# Altium PCB Gate_Driver_SMPS_V2.0_PCB4.PcbDoc
Units mm, origin at the board's own origin, x right, y up, seen from the top; angles counter-clockwise.
Board outline 50 x 30 mm, 2 copper layers (Top Layer, Bottom Layer); 42 components, 33 nets, 126 pads, 40 vias.
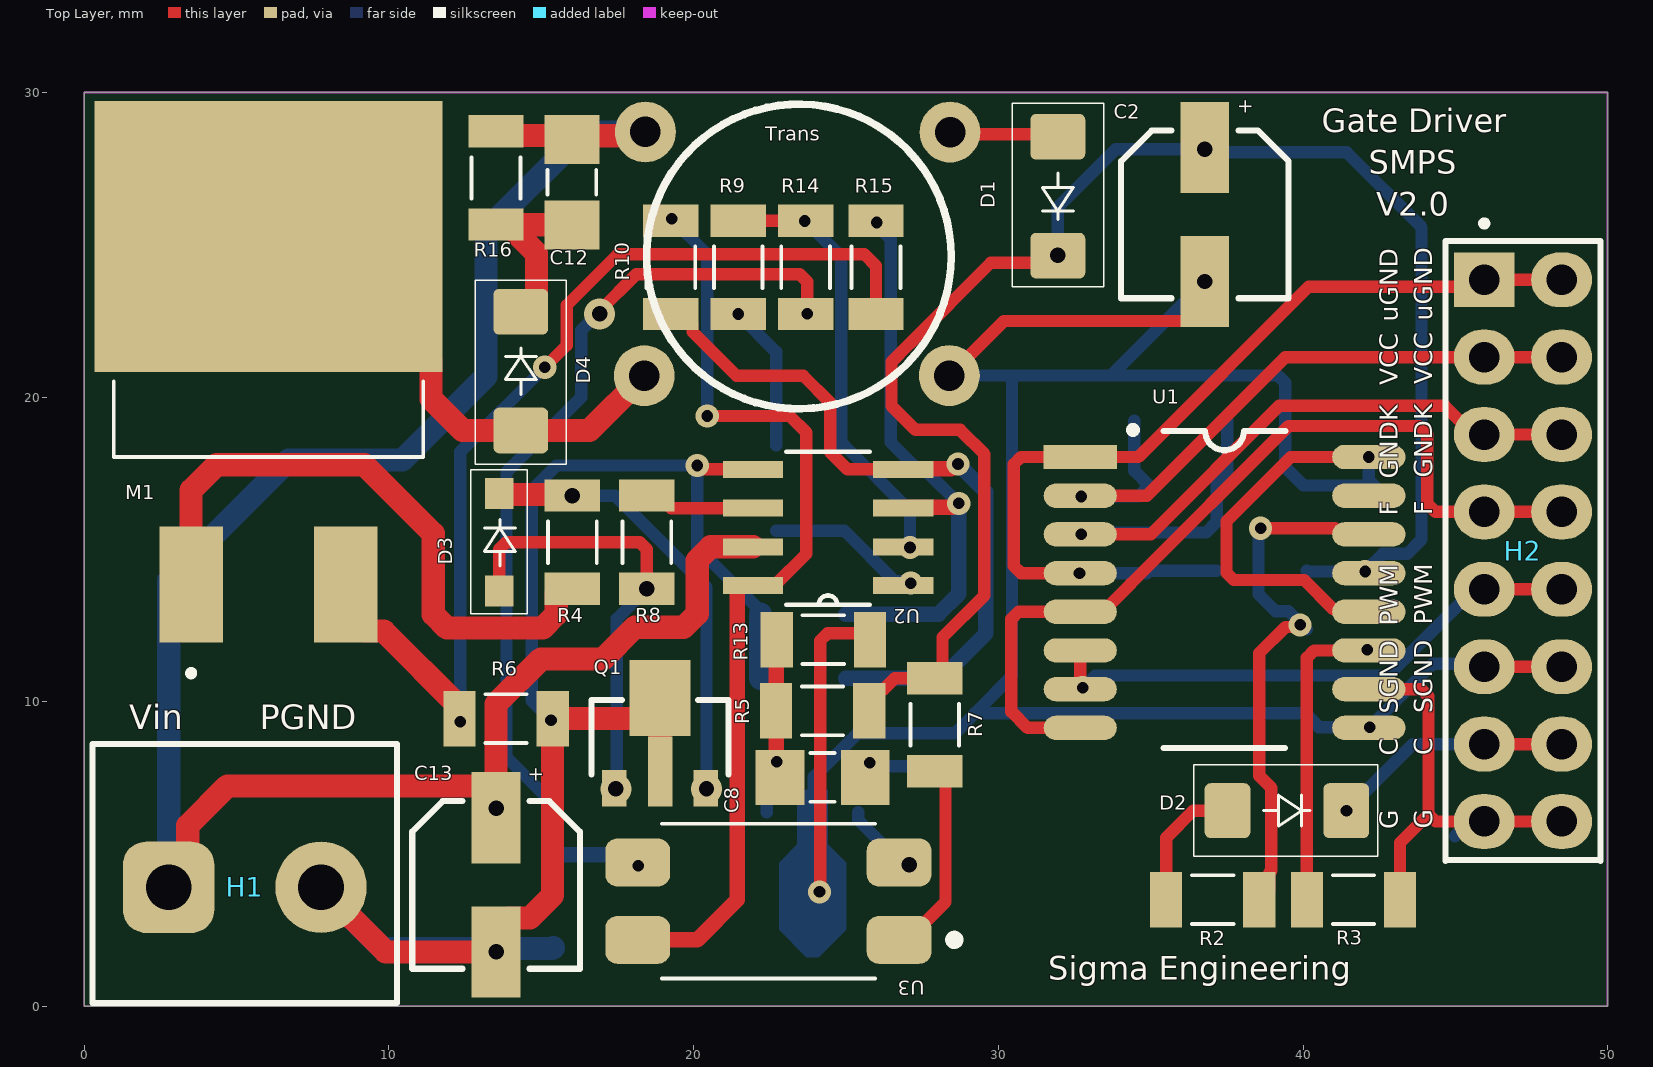
[diagram p0: Top Layer view]
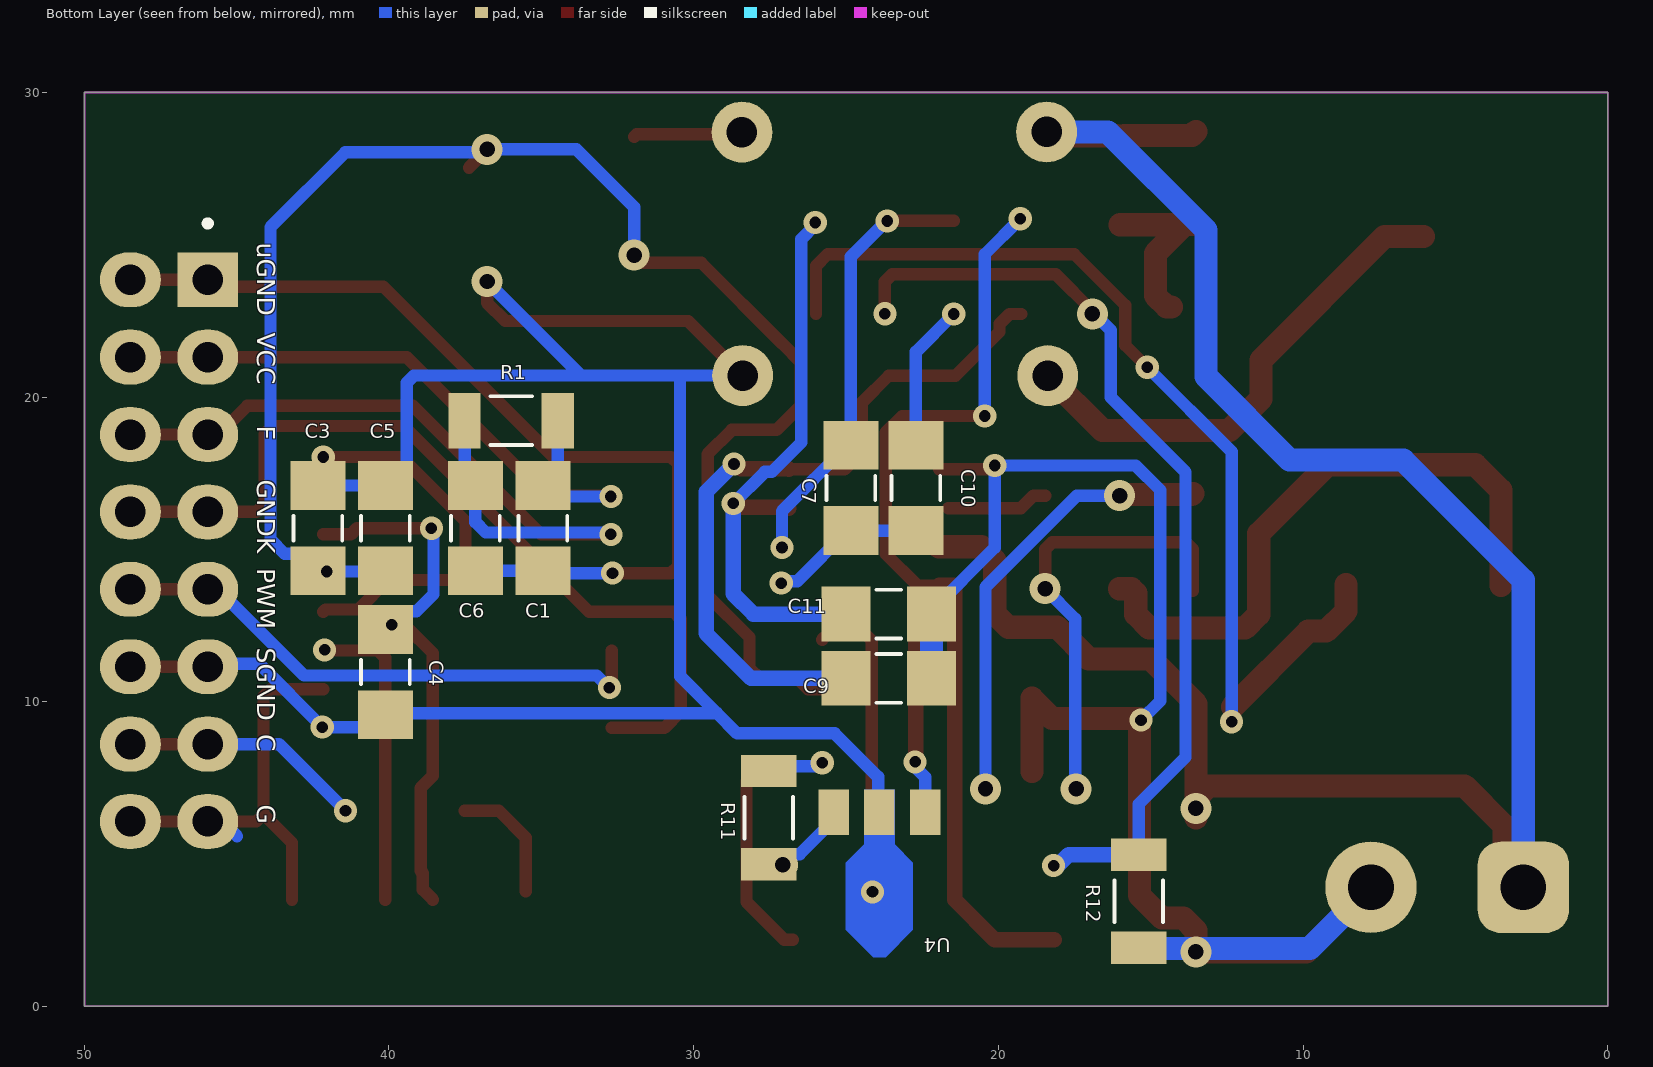
[diagram p1: Bottom Layer view, seen from below]
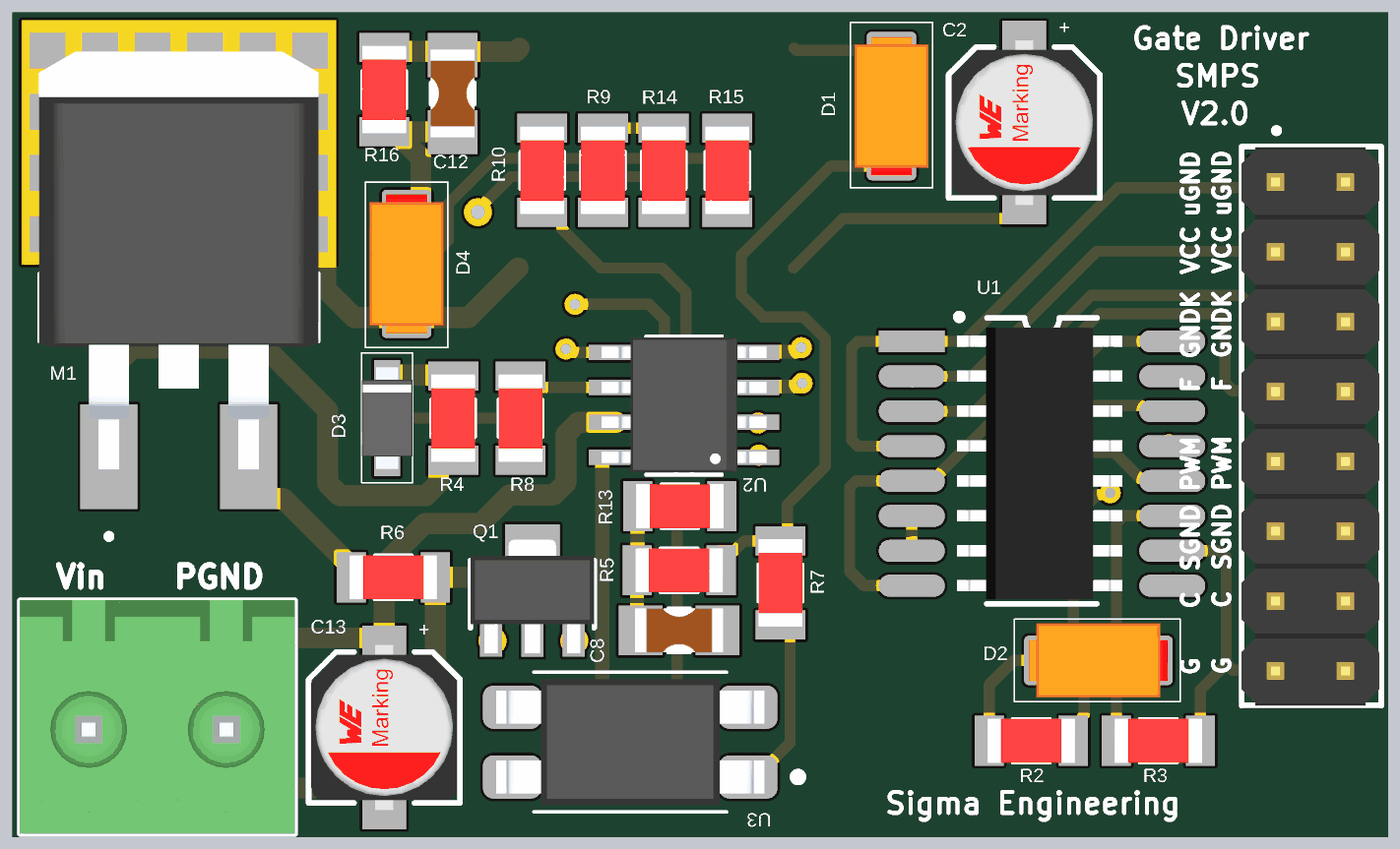
[diagram p2: 3D render of the assembled board from above, using the file's embedded part models]
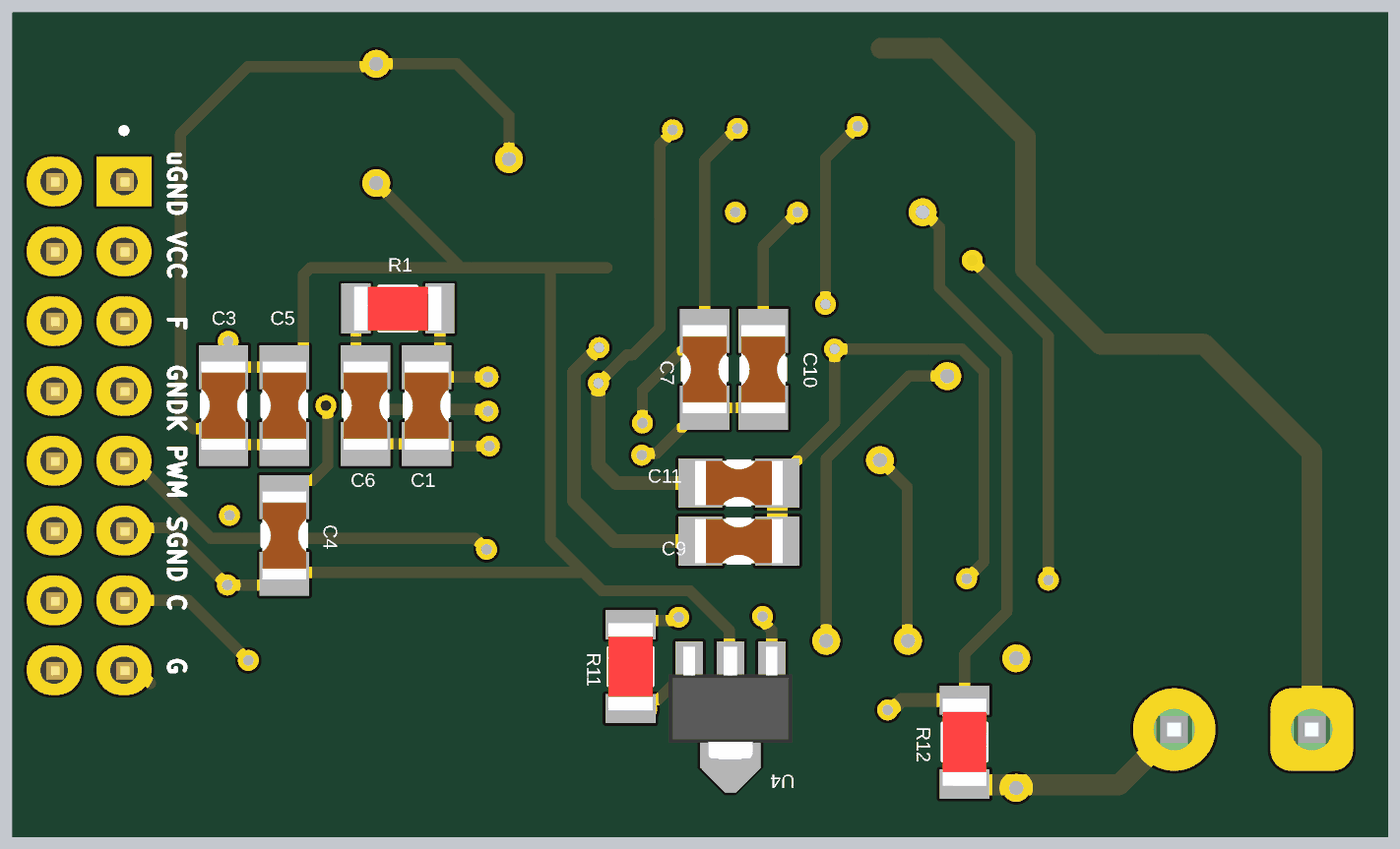
[diagram p3: 3D render of the assembled board from below, using the file's embedded part models]

## Layer stack, top to bottom
Top Solder: solder mask 0.0102, Solder Resist, Dk 3.5
Top Layer: signal copper 0.0356
Dielectric 1: dielectric 0.32, FR-4, Dk 4.8
Bottom Layer: signal copper 0.0356
Bottom Solder: solder mask 0.0102, Solder Resist, Dk 3.5

## Board outline
0,0 50,0 50,30 0,30

## Design rules (kind name [scope] priority, off if disabled: settings)
Clearance [All] p1: gap=0.254 ignorepadtopadclearanceinfootprint=FALSE except(0: Arc-Hole Track-Hole SMDPad-Hole THPad-Hole Via-Hole Fill-Hole Poly-Hole Region-Hole Text-Hole)
MinimumSolderMaskSliver [All] p1: minsoldermaskwidth=0.1
PolygonConnect [All] p1: connectstyle=Relief reliefconductorwidth=0.254 reliefentries=4 polygonreliefangle="90 Angle" airgapwidth=0.254
RoutingVias [All] p1: holewidth=0.508 width=1.016 viastyle="Through Hole" minholewidth=0.381 minwidth=0.762 maxholewidth=0.762 maxwidth=1.524
SilkToSilkClearance [All] p1: silktosilkclearance=0
SilkToSolderMaskClearance [IsPad] p1: minsilkscreentomaskgap=0 clearancetoexposedcopper=TRUE
SolderMaskExpansion [All] p1: expansion=0.102 istentingtop=FALSE
Width [All] p1: maxlimit=0.762 minlimit=0.406 preferedwidth=0.508
27 further rules are at their usual default settings.

## Components (designator, comment, footprint, x,y, rotation, side; value= is the part's Value field where it differs from the comment)
C1 "0.1u" CAP_1206 34.95,15.697 r270 bottom
C2 "470u-50v" WCAP-ASLI_D5H5.5 36.779,25.994 r90 top
C3 "100p" CAP_1206 42.333,15.697 r90 bottom
C4 "0.1u" CAP_1206 40.118,10.973 r270 bottom
C5 "0.1u" CAP_1206 40.118,15.697 r90 bottom
C6 "1n" CAP_1206 37.166,15.697 r270 bottom
C7 "10nAC" CAP_1206 24.841,17.018 r270 bottom
C8 "10n" CAP_1206 24.232,7.518 r180 top
C9 "13.6n" CAP_1206 23.597,10.77 r0 bottom
C10 "10nAC" CAP_1206 22.708,17.018 r270 bottom
C11 "100pf" CAP_1206 23.597,12.878 r0 bottom
C12 "3.3n" CAP_1206 16.002,27.051 r90 top
C13 "470u-50v" WCAP-ASLI_D5H5.5 13.513,3.988 r90 top
D1 "Diode" US1K_SMD 31.953,26.594 r90 top
D2 "Diode" US1K_SMD 39.472,6.426 r180 top
D3 "1N5817" 1N5817W 13.614,15.24 r270 top
D4 "Diode" US1K_SMD 14.326,20.853 r270 top
H1 "PS-IN" PLUG 5.269,4.362 r0 top
H2 "H2*8" HDR2X8 45.949,23.851 r270 top
M1 "IRF540N" IRF540N_SMD 6.045,20.828 r90 top
Q1 "B772-PNP" B772_SMD 18.898,8.763 r0 top
R1 "4.7K" RES_1206 35.992,19.228 r180 bottom
R2 "100" RES_1206 37.033,3.505 r0 top
R3 "8.2" RES_1206 41.656,3.505 r0 top
R4 "20" RES_1206 16.02,15.24 r90 top
R5 "13.5K" RES_1206 24.232,9.703 r0 top
R6 "0.25/4W" RES_1206 13.843,9.449 r180 top
R7 "1K" RES_1206 27.915,9.246 r90 top
R8 "47" RES_1206 18.466,15.24 r90 top
R9 "11.2K" RES_1206 21.463,24.257 r270 top
R10 "600-POTENTIO" RES_1206 19.253,24.257 r90 top
R11 "16K" RES_1206 27.534,6.198 r90 bottom
R12 "1K" RES_1206 15.392,3.454 r90 bottom
R13 "2.5K" RES_1206 24.257,12.04 r180 top
R14 "5.6K" RES_1206 23.673,24.257 r270 top
R15 "42K" RES_1206 25.984,24.257 r270 top
R16 "510" RES_1206 13.513,27.193 r90 top
Trans "core-name" TRANSFORMER_2 15.165,-65.548 r0 top locked (schematic designator trans1)
U1 "FOD8332" "SO16 - W" 32.69,18.034 r0 top
U2 "UC3843BN" UC3843_SMD 24.409,15.723 r180 top
U3 "PC817" PC816_SMD 22.454,3.454 r180 top
U4 "TL431" VREG_TL431IPK 23.901,4.369 r0 bottom

## Footprints (in the part's own frame and the unit in brackets; to place one, negate y for a bottom-side part, rotate by r counter-clockwise, add the part's x,y. Pads: shape width x height; smd on the part's side, far side on the other; paste and mask are expansions set on the pad)
1N5817W [mm]
  rect 1.02x0.94 smd: A(1.6,0) C(-1.6,0)
  silkscreen extent -2.37,-0.92 2.35,0.92, body extent -1.85,-0.92 1.85,0.92, height 1.35
B772_SMD [mm]
  rect 0.8x1.2 smd: B(-1.5,-1.6) E(1.5,-1.6)
  rect 0.8x2.3 smd paste-2 mask+0: C(0,-1.05)
  rect 2x2.5 smd: C(0,1.36)
  silkscreen extent -2.25,-1.15 2.25,1.3, body extent -2.25,-2.07 2.25,2.05, height 1.6
CAP_1206 [mm]
  rect 1.6x1.8 smd: 1(-1.4,0) 2(1.4,0)
  silkscreen extent -0.4,-0.8 0.4,0.8, body extent -1.6,-0.8 1.6,0.8, height 1.5
HDR2X8 [mm] "Connector; Header; 4x2 Position"
  oval 1.8x2 hole 1: 1(0,2.54) 2(2.54,2.54) 2(2.54,0) 3(5.08,2.54) 3(5.08,0) 4(7.62,0) 4(7.62,2.54) 5(10.16,0) 5(10.16,2.54) 6(12.7,0) 6(12.7,2.54) 7(15.24,0) 7(15.24,2.54) 8(17.78,0) 8(17.78,2.54)
  rect 1.8x2 hole 1: 1(0,0)
  silkscreen extent -1.95,-1.27 19.08,3.81, body extent -1.24,-1.27 19.08,3.73, height 8.6
IRF540N_SMD [mm]
  rect 8.89x11.43 smd paste-7: D(4.445,0)
  rect 3.81x2.08 smd: G(-6.985,2.54) S(-6.985,-2.54)
  silkscreen extent -9.99,-5.08 -0.32,5.08, body extent -7.49,-5.08 7.75,5.08, height 4.83
PC816_SMD [mm]
  rrect50% 2.13x1.57 smd: 1(-4.29,1.27) 2(-4.29,-1.27) 3(4.29,-1.27) 4(4.29,1.27)
  silkscreen extent -6.25,-2.54 3.5,2.54, body extent -4.87,-2.29 4.87,2.29, height 4
PLUG [mm] "5.00mm - Open Vertical PCB Header - 02p"
  rrect50% 3x3 hole 1.5: 1(-2.5,-0.45)
  round 3 hole 1.5: 2(2.5,-0.45)
  silkscreen extent -5,-4.25 5,4.25, body extent -5,-4.25 5,4.25, height 12.1
RES_1206 [mm]
  rect 1.06x1.82 smd: 1(-1.528,0) 2(1.528,0)
  silkscreen extent -0.68,-0.8 0.68,0.8, body extent -1.6,-0.8 1.6,0.8, height 0.7
"SO16 - W" [mm]
  rect 2.4x0.8 smd: 1(0,0)
  oval 2.4x0.8 smd: 2(0,-1.27) 3(0,-2.54) 4(0,-3.81) 5(0,-5.08) 6(0,-6.35) 7(0,-7.62) 8(0,-8.89) 9(9.47,-8.89) 10(9.47,-7.62) 11(9.47,-6.35) 12(9.47,-5.08) 13(9.47,-3.81) 14(9.47,-2.54) 15(9.47,-1.27) 16(9.47,0)
  silkscreen extent 1.63,-9.55 6.73,0.99, body extent 1.65,-9.39 7.65,0.51, height 1.4
TRANSFORMER_2 [mm]
  round 2 hole 1: 1(3.212,86.25) 2(3.25,94.25) 3(13.226,86.255) 4(13.249,94.247)
  silkscreen extent 3.29,85.16 13.29,95.16, body extent 3.23,85.26 13.23,95.26, height 7
UC3843_SMD [mil]
  rect 78x22 smd: 1(-97,75) 2(-97,25) 3(-97,-25) 4(-97,-75) 5(97,-75) 6(97,-25) 7(97,25) 8(97,75)
  silkscreen extent -54,-98 54,100, body extent -118,-96 118,96, height 69
US1K_SMD [mm]
  rrect25% 1.5x1.8 smd: A(1.95,0) K(-1.95,0)
  silkscreen extent -2.97,-1.5 3.05,1.5, body extent -2.53,-1.35 2.52,1.35, height 2.17
VREG_TL431IPK [mm]
  rect 1x1.5 smd paste-2 mask+0: A(0,-2)
  rect 1x1.5 smd: C(1.5,-2) R(-1.5,-2)
  Top Layer region: 1.1,1.85 1.1,-0.35 0.5,-0.95 0.5,-2.75 -0.5,-2.75 -0.5,-0.95 -1.1,-0.35 -1.1,1.85 -0.2,2.75 0.2,2.75
  body extent -2.25,-2.56 2.25,1.54, height 1.6
WCAP-ASLI_D5H5.5 [mm] "Aluminium Electrolytic V-Chip SMT Capacitors, 5x5.5mm"
  rect 3x1.6 smd: 1(2.2,0) 2(-2.2,0)
  silkscreen extent -2.75,-2.75 2.75,2.75, body extent -3,-2.65 3,2.65, height 5.5

## Part data
C1 C2 C3 C4 C5 C6 C13: library part CAP-DC
C7 C8 C9 C10 C11 C12: library part CAP-AC
D3: "Lite-On 1N5817, Schottky Diode, 20V 3A, 2-Pin DO-201AD", Average Rectified Current=3A, Case/Package=DO-201AD, Forward Voltage=850mV, Manufacturer=Vishay, Manufacturer Part Number=1N5820, Max Forward Surge Current (Ifsm)=80A, Max Operating Temperature=125°C, Max Repetitive Reverse Voltage (Vrrm)=20V, Max Reverse Current=150uA, Max Reverse Leakage Current=2mA, Min Operating Temperature=-65°C, Supplier Part Number 1=700-9899, ComponentLink1Description=http://www.liteon-semi.com/download.php?hSFile=1N5820-1N5822-5.pdf&hDFile=tecfile01312524214.pdf&src-supplier=Avnet+Asia, ComponentLink1URL=http://www.liteon-semi.com/download.php?hSFile=1N5820-1N5822-5.pdf&hDFile=tecfile01312524214.pdf&src-supplier=Avnet+Asia, ComponentLink2Description=http://docs-usa.electrocomponents.com/techlib:/itc_doclist_US.htm?stockno=7009899&src-supplier=Allied+Electronics, ComponentLink2URL=http://docs-usa.electrocomponents.com/techlib:/itc_doclist_US.htm?stockno=7009899&src-supplier=Allied+Electronics, Element Configuration=Single, Forward Current=3A, Height=5.3mm, Length=9.5mm, Max Surge Current=80A, Mount="Through Hole", Number of Pins=2, Packaging=Bulk, Peak Non-Repetitive Surge Current=80A, Radiation Hardening=No, RoHS Compliant=No, Stock 1=0, Supplier 1=RSComponents, Width=5.3mm
H1: library part PS-plug
H2: library part "Header 8X2"
M1: "Mosfet, Power; N-ch; Vdss 100V; Rds(on) 44MILLIOHMS; Id 33A; TO-220AB; Pd 130W; -55DEG", Case/Package=TO-220AB, Continuous Drain Current (ID)=33A, Gate to Source Voltage (Vgs)=20V, Manufacturer="International Rectifier", Max Operating Temperature=175°C, Min Operating Temperature=-55°C, Power Dissipation=130W, Supplier Part Number 1=IRF540NPBF-TUBE, ComponentLink1Description=http://www.produktinfo.conrad.com/datenblaetter/150000-174999/162412-da-01-en-IRF_540_N.pdf?src-supplier=Conrad, ComponentLink1URL=http://www.produktinfo.conrad.com/datenblaetter/150000-174999/162412-da-01-en-IRF_540_N.pdf?src-supplier=Conrad, Manufacturer Part Number=IRF540N, Mount="Through Hole", Number of Elements=1, Number of Pins=3, RoHS Compliant=No, Stock 1=0, Supplier 1="Future Electronics"
R1 R2 R3 R4 R5 R6 R7 R8 R9 R10 R11 R12 R13 R14 R15 R16: library part RES
Trans: library part "flyback trans"
U1: library part TLP5214A
U2: "IC REG CTRLR BST/FLYBK 8-MINIDIP", Case/Package=PDIP, Frequency=250kHz, Manufacturer=STMicroelectronics, Max Frequency=500kHz, Max Operating Temperature=150°C, Max Power Dissipation=800mW, Max Supply Current=17mA, Max Supply Voltage=30V, Min Operating Temperature=-40°C, Min Supply Voltage=12V, Output Current=1A, Output Voltage=5.1V, Package Quantity=50, ComponentLink1Description=http://www.st.com/content/ccc/resource/technical/document/datasheet/b6/e8/cc/ba/4f/cd/42/9b/CD00000966.pdf/files/CD00000966.pdf/jcr:content/translations/en.CD00000966.pdf?src-supplier=Digi-Key, ComponentLink1URL=http://www.st.com/content/ccc/resource/technical/document/datasheet/b6/e8/cc/ba/4f/cd/42/9b/CD00000966.pdf/files/CD00000966.pdf/jcr:content/translations/en.CD00000966.pdf?src-supplier=Digi-Key, ComponentLink2Description=http://www.mouser.com/ds/2/389/uc2842b-974450.pdf?src-supplier=Mouser, ComponentLink2URL=http://www.mouser.com/ds/2/389/uc2842b-974450.pdf?src-supplier=Mouser, ComponentLink3Description=http://www.st.com/web/en/resource/technical/document/datasheet/CD00000966.pdf?src-supplier=Avnet, ComponentLink3URL=http://www.st.com/web/en/resource/technical/document/datasheet/CD00000966.pdf?src-supplier=Avnet, ComponentLink4Description=http://www.st.com/web/en/resource/technical/document/datasheet/CD00000966.pdf?src-supplier=Future+Electronics, ComponentLink4URL=http://www.st.com/web/en/resource/technical/document/datasheet/CD00000966.pdf?src-supplier=Future+Electronics, ComponentLink5Description=https://www.verical.com/server-webapp/html/getDatasheet?partID=66041&src-supplier=Verical, ComponentLink5URL=https://www.verical.com/server-webapp/html/getDatasheet?partID=66041&src-supplier=Verical, ComponentLink6Description=http://www.produktinfo.conrad.com/datenblaetter/1100000-1199999/001185662-da-01-en-IC_REG_CTRLR_PWM_CM_UC3843BN_DIP_8_STM.pdf?src-supplier=Conrad, ComponentLink6URL=http://www.produktinfo.conrad.com/datenblaetter/1100000-1199999/001185662-da-01-en-IC_REG_CTRLR_PWM_CM_UC3843BN_DIP_8_STM.pdf?src-supplier=Conrad, Duty Cycle=100%, Fall Time=50ns, Height=3.32mm, Lead Free="Lead Free", Length=10.92mm, Manufacturer Part Number=UC3843BN, Max Duty Cycle=100%, Mount="Through Hole", Number of Outputs=1, Number of Pins=8, Packaging=Rail/Tube, Power Dissipation=800mW, Pricing 1="1=0.9063, 10=0.7523, 25=0.7389, 100=0.6172, 250=0.5737, 500=0.4903, 1000=0.3493, 4000=0.3129, 5000=0.3123, 6000=0.3104, 8000=0.3085, 10000=0.3066, 20000=0.3047, 25000=0.3027, 30000=0.3008, 50000=0.2988 (USD)", Radiation Hardening=No, REACH SVHC="No SVHC", Rise Time=50ns, RoHS Compliant=Yes, Series=-, Stock 1=669, Supplier 1="Arrow Electronics", Supplier Part Number 1=UC3843BN, Switching Frequency=500kHz, Topology=Boost,Flyback, Weight=0.032805oz, Width=6.6mm
U3: "Optocoupler DC-IN 1-CH Transistor DC-OUT 4-Pin PDIP Sleeve", Case/Package=PDIP, Collector Emitter Saturation Voltage=200mV, Collector Emitter Voltage (VCEO)=35V, Current Transfer Ratio=600%, Forward Current=50mA, Forward Voltage=1.4V, Manufacturer=Sharp, Max Operating Temperature=100°C, Min Operating Temperature=-30°C, Power Dissipation=200mW, Reverse Breakdown Voltage=6V, Fall Time=18000ns, Input Type=DC, Manufacturer Part Number=PC817, Mount="Through Hole", Number of Elements=1, Number of Pins=4, Packaging=Sleeve, Rise Time=18000ns, RoHS Compliant=No, Stock 1=0, Supplier 1="Arrow Electronics", Supplier Part Number 1=PC817
U4: library part TL431CZ, "V-Ref Adjustable 2.495V to 36V 100mA 3-Pin TO-92 Bulk", Case/Package=TO-92, Cathode Current=1mA, Manufacturer=STMicroelectronics, Max Input Voltage=37V, Max Operating Temperature=70°C, Max Output Current=100mA, Max Output Voltage=36V, Min Operating Temperature=0°C, Min Output Voltage=2.495V, Package Quantity=1, Temperature Coefficient=100ppm/°C, Tolerance=2.21%, Accuracy=2%, ComponentLink1Description=http://www.st.com/web/en/resource/technical/document/datasheet/CD00000986.pdf?src-supplier=Digi-Key, ComponentLink1URL=http://www.st.com/web/en/resource/technical/document/datasheet/CD00000986.pdf?src-supplier=Digi-Key, ComponentLink2Description=http://www.st.com/content/ccc/resource/technical/document/datasheet/2d/27/af/41/03/e2/44/8e/CD00000986.pdf/files/CD00000986.pdf/jcr:content/translations/en.CD00000986.pdf?src-supplier=Digi-Key, ComponentLink2URL=http://www.st.com/content/ccc/resource/technical/document/datasheet/2d/27/af/41/03/e2/44/8e/CD00000986.pdf/files/CD00000986.pdf/jcr:content/translations/en.CD00000986.pdf?src-supplier=Digi-Key, ComponentLink3Description=http://www.farnell.com/datasheets/1690313.pdf?src-supplier=Element14, ComponentLink3URL=http://www.farnell.com/datasheets/1690313.pdf?src-supplier=Element14, ComponentLink4Description=http://www.rapidonline.com/pdf/82-0290.pdf?src-supplier=Rapid+Electronics, ComponentLink4URL=http://www.rapidonline.com/pdf/82-0290.pdf?src-supplier=Rapid+Electronics, ComponentLink5Description=https://www.verical.com/server-webapp/html/getDatasheet?partID=98639&src-supplier=Verical, ComponentLink5URL=https://www.verical.com/server-webapp/html/getDatasheet?partID=98639&src-supplier=Verical, ComponentLink6Description=http://www.produktinfo.conrad.com/datenblaetter/150000-174999/155641-da-01-en-SPG_REF_TL431CZ_STM.pdf?src-supplier=Conrad, ComponentLink6URL=http://www.produktinfo.conrad.com/datenblaetter/150000-174999/155641-da-01-en-SPG_REF_TL431CZ_STM.pdf?src-supplier=Conrad, Height=4.4mm, Lead Free="Lead Free", Length=4.7mm, Manufacturer Part Number=TL431CZ, Mount="Through Hole", Nominal Supply Current=1mA, Number of Channels=1, Number of Pins=3, Output Current=100mA, Output Type=Adjustable, Output Voltage=36V, Packaging=Bulk, Pricing 1="1=0.4405, 10=0.3422, 100=0.2291, 500=0.1883, 1000=0.1722, 2500=0.1137, 10000=0.083, 1=0.3921, 10=0.3046, 100=0.2039, 500=0.1676, 1000=0.1299, 2500=0.1012, 10000=0.0723 (USD)", Radiation Hardening=No, REACH SVHC="No SVHC", Reference Type=Shunt,Adjustable, Reference Voltage=36V, RoHS Compliant=Yes, Series=-, Stock 1=5333, Supplier 1="Arrow Electronics", Supplier Part Number 1=TL431CZ, Supply Current=1mA, Weight=0.01lb, Width=3.7mm
D1 D2 D4: Datasheet=https://diotec.com/de/produktliste/D.html, ki_description=Diode, ki_keywords=Diode, Reference=D

## Via types
v1: diameter 0.762, hole 0.381, Top Layer to Bottom Layer, 29 vias
v2: diameter 1.016, hole 0.508, Top Layer to Bottom Layer, 11 vias

## Nets (pads, with @x,y where several pads share a name; then routed paths per layer and width w, separated by ;. In a path a pad name is that pad's centre, name@x,y a point inside that pad or via, vN(x,y) a via of type N, cw(c..) or ccw(c..) an arc to the next point about the centre after c; other vN are vias at no path point)
C: D2.K H2.7 | length 8
  Top Layer w0.406: D2.K v1(41.427,6.426) ; H2.7@45.949,8.611 H2.7@48.489,8.611
  Bottom Layer w0.406: v1(41.427,6.426) 43.612,8.611 H2.7@45.949,8.611
F: C6.1 H2.3 R1.1 U1.3 | length 26
  Top Layer w0.406: v1(32.715,15.494) 35.001,15.494 39.218,19.71 44.654,19.71 45.593,18.771 45.949,18.771 H2.3@48.489,18.771
  Bottom Layer w0.406: v1(32.715,15.494) 32.776,15.554 36.825,15.554 37.166,15.895 C6.1 37.52,17.451 R1.1
G: H2.8 R3.2 U1.10 | length 14.7
  Top Layer w0.406: U1.10 43.882,10.414 44.12,10.176 44.12,6.309 ; R3.2 43.184,5.373 44.12,6.309 ; H2.8@48.489,6.071 45.949,6.071 44.358,6.071 44.12,6.309
  Bottom Layer w0.406: 44.989,5.588 45.471,6.071 H2.8@45.949,6.071
GNDK: H2.4 U1.5 U1.8 | length 28.7
  Top Layer w0.406: U1.8 30.963,9.144 30.429,9.677 30.429,12.716 30.667,12.954 33.432,12.954 34.347,13.869 34.347,13.875 39.522,19.05 43.815,19.05 44.082,18.783 44.082,16.497 44.348,16.231 45.949,16.231 H2.4@48.489,16.231
Isns: M1.S R6.2 R15.2 | length 33.6
  Top Layer w0.406: v1(15.113,20.98) 15.834,21.701 15.834,23.015 17.507,24.689 25.603,24.689 25.984,24.308 R15.2
  Top Layer w0.762: M1.S 8.585,12.978 9.244,12.319 9.825,12.319 R6.2@12.315,9.829
  Bottom Layer w0.406: v1(12.344,9.347) 12.344,18.212 v1(15.113,20.98)
NetC4_1: C4.1 R2.2 U1.14 | length 18.1
  Top Layer w0.406: R2.2 38.888,3.832 38.888,4.374 38.964,4.45 38.964,7.171 38.561,7.573 38.561,11.592 39.424,12.454 39.835,12.454 v1(39.903,12.522) ; v1(38.608,15.697) 41.05,15.697 41.253,15.494 U1.14
  Bottom Layer w0.406: v1(38.608,15.697) 38.54,15.629 38.54,13.528 39.099,12.97 39.521,12.97 C4.1@39.936,12.555 ; v1(39.903,12.522) 39.968,12.522 C4.1
NetC7_1: C7.1 R9.1 R14.1 U2.2 | length 14.5
  Top Layer w0.406: R9.1 R14.1 23.669,25.781 v1(23.647,25.781)
  Bottom Layer w0.406: v1(23.647,25.781) 23.673,25.781 24.841,24.613 C7.1 24.941,18.418 27.102,16.257 v1(27.102,15.062)
NetC7_2: C7.2 C10.2 U2.1 | length 5.1
  Bottom Layer w0.406: C10.2 C7.2 24.941,15.618 26.597,13.962 27.059,13.962 v1(27.127,13.894)
NetC8_1: C8.1 R11.2 | length 1.9
  Bottom Layer w0.406: v1(25.781,7.997) 25.898,7.881 27.378,7.881 R11.2
NetC8_2: C8.2 R5.1 R13.2 U4.R | length 5.8
  Top Layer w0.406: R13.2@22.72,12.128 R13.2@22.733,12.141
  Top Layer w0.508: R13.2 22.716,12.027 22.716,9.97 22.704,9.957 22.704,8.056 v1(22.733,8.026)
  Bottom Layer w0.406: U4.R 22.401,7.53 22.733,7.861 v1(22.733,8.026)
NetC9_2: C9.2 R10.1 U2.4 | length 23.9
  Top Layer w0.406: R10.1 19.633,22.729 19.96,22.402 19.96,22.145 21.404,20.701 23.597,20.701 24.478,19.82 24.478,18.197 25.047,17.628 U2.4
  Top Layer w0.508: U2.4 26.899,17.653 28.455,17.653 28.608,17.805 v1(28.677,17.805)
  Bottom Layer w0.508: C9.2 28.118,10.77 29.591,12.243 29.591,16.891 v1(28.677,17.805)
NetC10_1: C10.1 R9.2 | length 4.8
  Bottom Layer w0.406: v1(21.463,22.729) 22.708,21.484 C10.1
NetC11_2: C11.2 R15.1 U2.3 | length 19.3
  Top Layer w0.508: U2.3 26.899,16.383 28.506,16.383 28.633,16.51 v1(28.702,16.51)
  Bottom Layer w0.406: v1(26.01,25.73) 26.01,25.645 26.467,25.187 26.467,18.517 27.436,17.547 27.665,17.547 v1(28.702,16.51)
  Bottom Layer w0.508: C11.2 28.042,12.878 28.702,13.538 v1(28.702,16.51)
NetC12_1: C12.1 D4.K R16.1 | length 5.9
  Top Layer w0.762: R16.1 13.893,25.665 R16.1@13.9,25.658 ; D4.K@14.326,22.962 14.476,22.962 14.845,23.331 14.845,24.713 R16.1@13.9,25.658 ; C12.1 15.995,25.658 R16.1@13.9,25.658
NetD1_A: D1.A Trans.4 | length 3.6
  Top Layer w0.406: Trans.4 28.492,28.621 31.876,28.621 D1.A
NetD2_A: D2.A R2.1 | length 4.1
  Top Layer w0.406: R2.1@35.505,3.785 35.505,5.533 36.398,6.426 D2.A
NetD3_A: D3.A Q1.B R8.1 | length 14.7
  Top Layer w0.406: D3.A 13.614,15.002 13.852,15.24 18.228,15.24 18.466,15.002 v2(18.466,13.712)
  Bottom Layer w0.406: v2(17.45,7.137) 17.475,7.163 17.475,12.721 v2(18.466,13.712)
NetD3_C: D3.C Q1.E R4.2 | length 14.7
  Top Layer w0.762: D3.C 13.65,16.804 15.984,16.804 v2(16.02,16.768)
  Bottom Layer w0.406: v2(16.02,16.768) 17.42,16.768 20.422,13.767 v2@20.422,7.188
  other v2: 20.422,7.137
NetD4_A: D4.A M1.D Trans.1 | length 16.5
  Top Layer w0.762: M1.D 7.315,25.273 11.379,21.209 11.379,19.939 12.415,18.903 D4.A 16.578,18.903 Trans.1
NetM1_G: M1.G R4.1 | length 20.7
  Top Layer w0.762: M1.G@3.505,13.818 3.505,16.942 4.343,17.78 9.195,17.78 11.455,15.519 11.455,12.867 11.902,12.421 15.045,12.421 15.491,12.867 15.491,13.563 15.64,13.712 R4.1
NetR3_1: R3.1 U1.11 | length 10.1
  Top Layer w0.406: R3.1 40.128,11.446 40.366,11.684 42.095,11.684 v1(42.113,11.702) 42.131,11.684 U1.11
NetR7_1: R7.1 U3.1 | length 6.5
  Top Layer w0.406: U3.1 27.024,2.184 28.266,3.427 28.266,7.391 27.939,7.718 R7.1
NetR11_1: R11.1 U3.2 U4.C | length 2.9
  Bottom Layer w0.406: U4.C 25.401,6.119 26.524,4.996 R11.1@27.076,4.996 ; v2(27.076,4.648) 27.098,4.67 R11.1
PGND: C9.1 C11.1 C13.2 H1.2 Q1.C R6.1 R12.1 U2.5 | length 53.4
  Top Layer w0.406: v1(20.117,17.755) 20.213,17.755 20.34,17.628 U2.5
  Top Layer w0.762: H1.2 9.892,1.788 v2(13.513,1.788) 13.513,2.488 13.932,2.907 14.632,2.907 15.371,3.646 R6.1@15.371,9.398 ; R6.1 18.229,9.449 Q1.C@18.898,10.117 ; Q1.C@18.898,7.713 Q1.C@18.898,10.117 ; Q1.C@18.898,10.123 Q1.C@18.898,10.117
  Bottom Layer w0.406: v1(15.316,9.398) 14.681,10.033 14.681,16.942 15.494,17.755 v1(20.117,17.755) 20.117,15.058 22.197,12.978 C11.1
  Bottom Layer w0.762: H1.2 9.779,1.901 15.367,1.901 R12.1 ; C9.1 C11.1
PMW: H2.5 U1.6 U1.7 | length 18.3
  Top Layer w0.406: U1.6 32.69,10.541 v1(32.766,10.465) ; H2.5@45.949,13.691 H2.5@48.489,13.691
  Bottom Layer w0.406: v1(32.766,10.465) 32.783,10.465 33.182,10.864 42.792,10.864 45.618,13.691 H2.5@45.949,13.691
pwm: R8.2 U2.6 | length 3.3
  Top Layer w0.406: R8.2 18.846,16.768 19.256,16.358 U2.6@21.641,16.358
SGND: C2.2 C3.2 C4.2 C5.2 H2.6 R13.1 Trans.3 U1.9 U1.12 U1.16 U4.A | length 93.9
  Top Layer w0.406: v1(24.13,3.759) 24.155,3.785 24.155,12.005 24.393,12.243 25.582,12.243 R13.1 ; Trans.3 30.181,22.497 36.182,22.497 36.779,23.094 v2(36.779,23.794) ; U1.12 42.084,13.029 41.006,13.029 40.04,13.995 37.728,13.995 37.49,14.233 37.49,15.926 39.599,18.034 v1(42.16,18.034) ; H2.6@45.949,11.151 H2.6@48.489,11.151
  Bottom Layer w0.406: U4.A@23.927,6.738 23.927,6.898 23.944,6.916 23.944,7.536 25.371,8.963 28.571,8.963 29.248,9.639 ; Trans.3 30.449,20.707 ; v2(36.779,23.794) 33.692,20.707 ; v1(42.16,18.034) 42.16,17.271 C3.2 C5.2 40.018,17.097 39.421,17.694 39.421,20.469 39.183,20.707 33.692,20.707 ; H2.6@45.949,11.151 45.847,11.252 44.272,11.252 v1(42.189,9.169) 40.521,9.169 40.064,9.627 29.261,9.627 29.248,9.639 ; 29.248,9.639 30.449,10.84 30.449,20.707 ; 30.449,20.707 33.692,20.707
uGND: C1.2 C6.2 H2.1 U1.1 U1.4 | length 30.6
  Top Layer w0.406: U1.4 30.743,14.224 30.505,14.462 30.505,17.796 30.743,18.034 U1.1 34.595,18.034 40.183,23.622 45.72,23.622 45.949,23.851 H2.1@48.489,23.851
  Bottom Layer w0.406: v1(32.664,14.224) 34.877,14.224 C1.2 C6.2
VCC: C1.1 H2.2 R1.2 U1.2 | length 22.4
  Top Layer w0.406: v1(32.715,16.739) 32.741,16.764 34.874,16.764 39.421,21.311 45.949,21.311 H2.2@48.489,21.311
  Bottom Layer w0.406: v1(32.715,16.739) 34.592,16.739 C1.1 34.464,17.584 R1.2
Vfb: R12.2 R14.2 U3.3 | length 31.4
  Top Layer w0.406: v2(16.916,22.733) 16.916,22.835 18.11,24.028 23.486,24.028 23.724,23.79 v1(23.724,22.733) 23.72,22.729 R14.2
  Top Layer w0.508: U3.3 18.186,4.702 v1(18.186,4.623)
  Bottom Layer w0.406: R12.2 15.392,6.644 13.857,8.179 13.857,17.54 16.307,19.99 16.307,22.19 16.85,22.733 v2(16.916,22.733)
  Bottom Layer w0.508: R12.2 17.689,4.982 18.049,4.623 v1(18.186,4.623)
Vin: C12.2 C13.1 H1.1 R16.2 Trans.2 U2.7 | length 68.2
  Top Layer w0.762: H1.1 3.397,4.54 3.397,5.937 4.699,7.239 13.094,7.239 C13.1@13.513,6.82 ; C13.1 C13.1@13.513,6.82 ; R16.2 13.648,28.586 15.867,28.586 C12.2 16.127,28.576 18.289,28.576 Trans.2 ; U2.7 20.563,15.088 20.117,14.641 20.117,12.892 19.67,12.446 18.072,12.446 17.031,11.405 14.989,11.405 13.513,9.929 C13.1@13.513,6.82
  Bottom Layer w0.762: H1.1 2.769,13.995 6.706,17.932 10.439,17.932 13.183,20.676 13.183,25.476 16.408,28.702 Trans.2
  other v2: 13.513,6.504
Voiso: C2.1 C3.1 C5.1 D1.K R5.2 R7.2 U1.13 | length 52.9
  Top Layer w0.406: R5.2@25.662,10.414 26.246,10.414 26.606,10.774 R7.2 ; R7.2@27.842,10.774 28.169,11.1 28.169,12.116 29.54,13.487 29.54,18.127 28.744,18.923 27.28,18.923 26.492,19.71 26.492,21.158 27.076,21.742 27.084,21.742 29.751,24.409 D1.K@31.719,24.409 ; v2(36.779,28.13) C2.1@37.376,27.534 ; U1.13@41.986,14.224 v1(42.037,14.275)
  Bottom Layer w0.406: v2(31.953,24.663) 31.953,26.238 33.845,28.13 v2(36.779,28.13) 36.877,28.032 41.437,28.032 43.891,25.578 43.891,15.326 43.425,14.859 42.621,14.859 v1(42.037,14.275) 40.14,14.275 C5.1
Vref: R10.2 U2.8 U3.4 | length 31.2
  Top Layer w0.406: v1(20.447,19.38) 23.155,19.38 23.698,18.837 23.698,14.859 22.657,13.818 U2.8
  Top Layer w0.508: U3.4 20.117,2.184 21.438,3.505 21.438,13.792 21.463,13.818 U2.8
  Bottom Layer w0.406: v1(19.279,25.857) 20.447,24.689 v1(20.447,19.38)
pads on no net: U1.15

## Keep-outs
Keep-Out Layer:
  lines w0.05: 0,0 0,29.997 49.987,29.997 49.987,0 0,0

## Silkscreen, mask and mechanical layers (free items; w line width, h text height)
Top Overlay:
  text "Gate Driver" at 40.612,28.694 h0.76
  text "SMPS" at 42.166,27.326 h0.76
  text "V2.0" at 42.397,25.958 h0.76
  text "uGND" at 44.249,22.502 h0.6 r90
  text "uGND" at 43.106,22.477 h0.6 r90
  text "VCC" at 44.249,20.419 h0.6 r90
  text "VCC" at 43.106,20.394 h0.6 r90
  text "GNDK" at 44.249,17.346 h0.6 r90
  text "GNDK" at 43.106,17.321 h0.6 r90
  text "F" at 44.249,16.127 h0.6 r90
  text "F" at 43.106,16.102 h0.6 r90
  text "PWM" at 44.249,12.52 h0.6 r90
  text "PWM" at 43.106,12.495 h0.6 r90
  text "SGND" at 44.249,9.624 h0.6 r90
  text "SGND" at 43.106,9.599 h0.6 r90
  text "Vin" at 1.47,9.09 h0.8
  text "PGND" at 5.763,9.09 h0.8
  text "C" at 44.249,8.253 h0.6 r90
  text "C" at 43.106,8.228 h0.6 r90
  text "G" at 44.249,5.84 h0.6 r90
  text "G" at 43.106,5.815 h0.6 r90
  text "Sigma Engineering" at 31.64,0.873 h0.76
Bottom Overlay:
  text "uGND" at 44.325,25.061 h0.6 r90
  text "VCC" at 44.325,22.114 h0.6 r90
  text "F" at 44.325,19.066 h0.6 r90
  text "GNDK" at 44.325,17.288 h0.6 r90
  text "PWM" at 44.325,14.379 h0.6 r90
  text "SGND" at 44.325,11.777 h0.6 r90
  text "C" at 44.325,8.932 h0.6 r90
  text "G" at 44.325,6.62 h0.6 r90

## Text inside footprints (layer, text, board x,y; h text height)
C2: Top Overlay "+" at 38.481,29.261 h0.8 r90
C13: Top Overlay "+" at 15.189,7.341 h0.8 r90